# Altium PCB usb05.pcbdoc
Units mm, origin at the board's own origin, x right, y up, seen from the top; angles counter-clockwise.
Board outline 43.06 x 53.77 mm, 2 copper layers (Top Layer, Bottom Layer); 1 components, 6 nets, 9 pads, 0 vias.
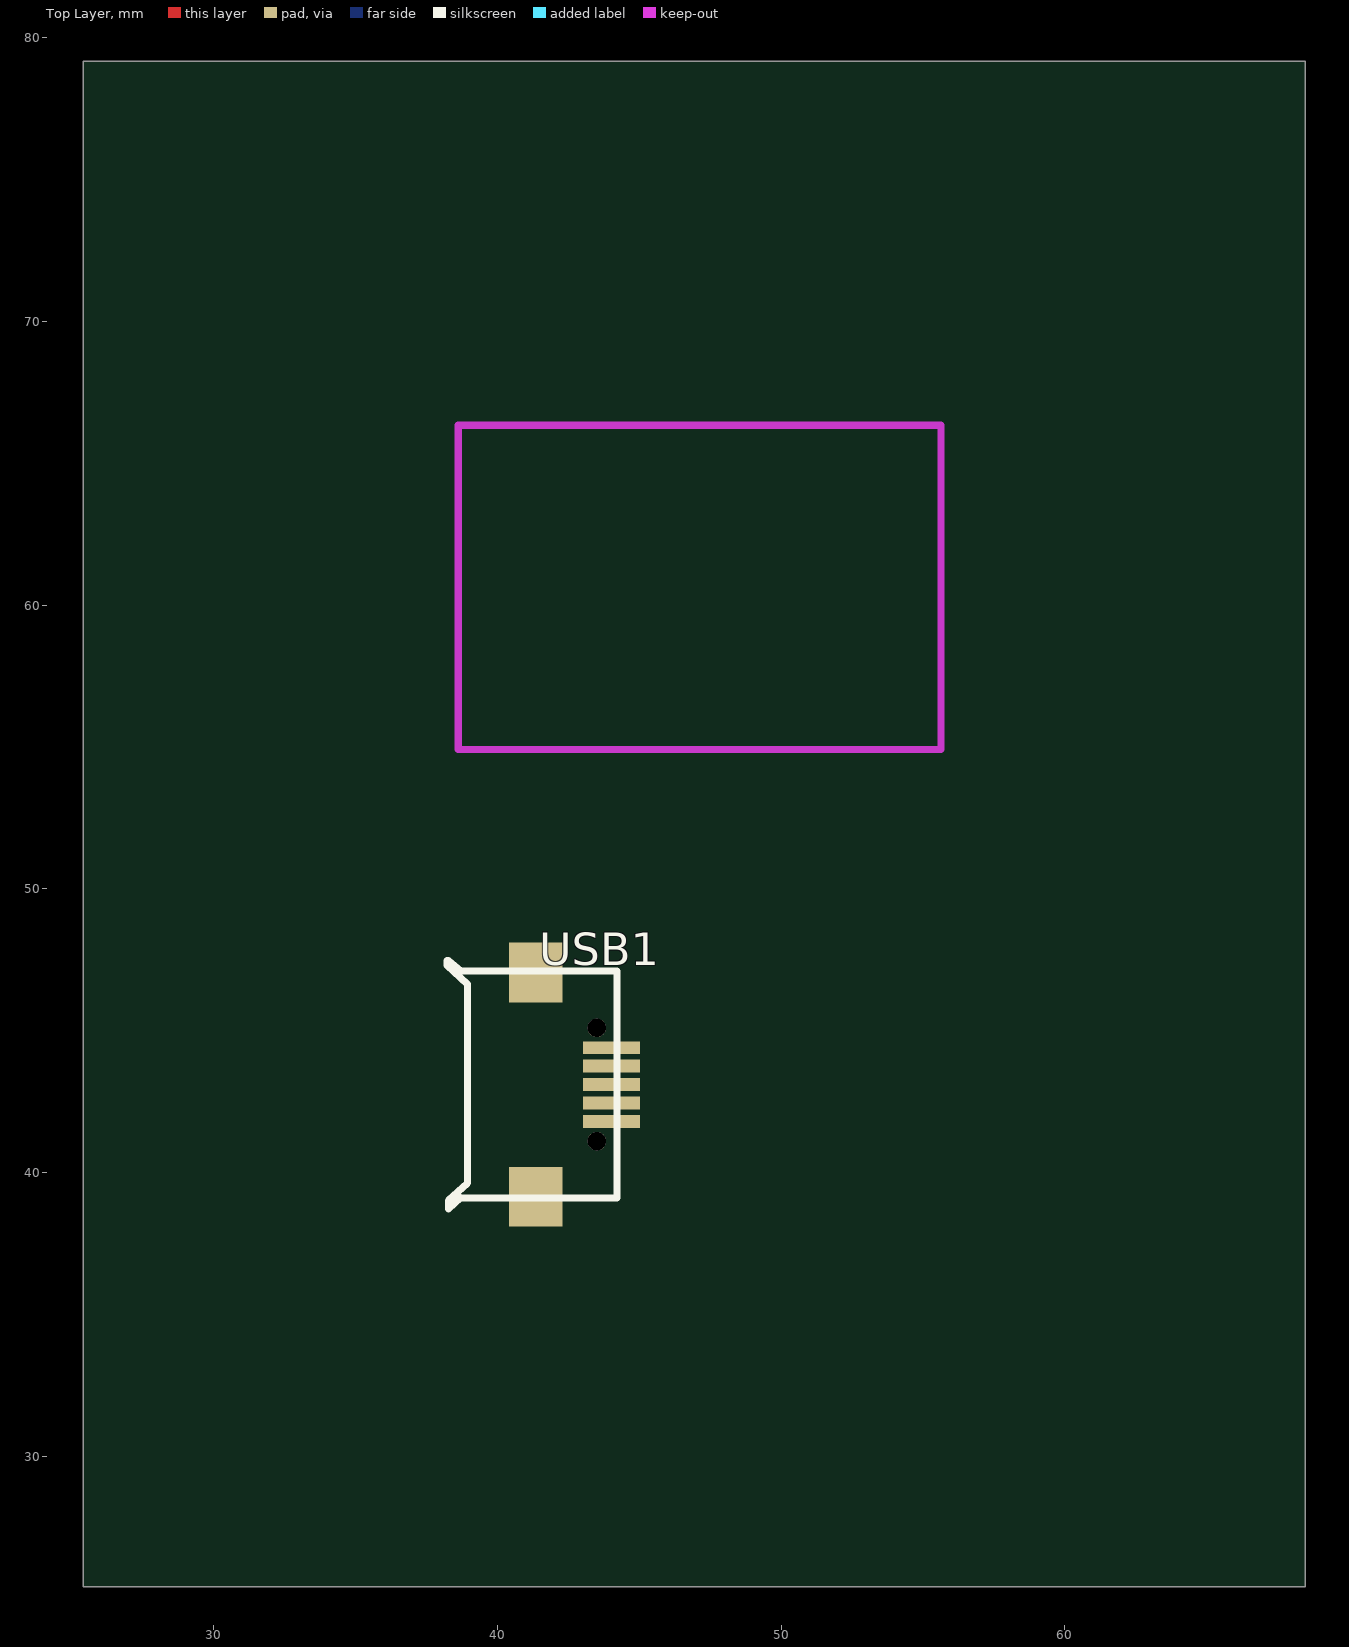
[diagram p0: Top Layer view]
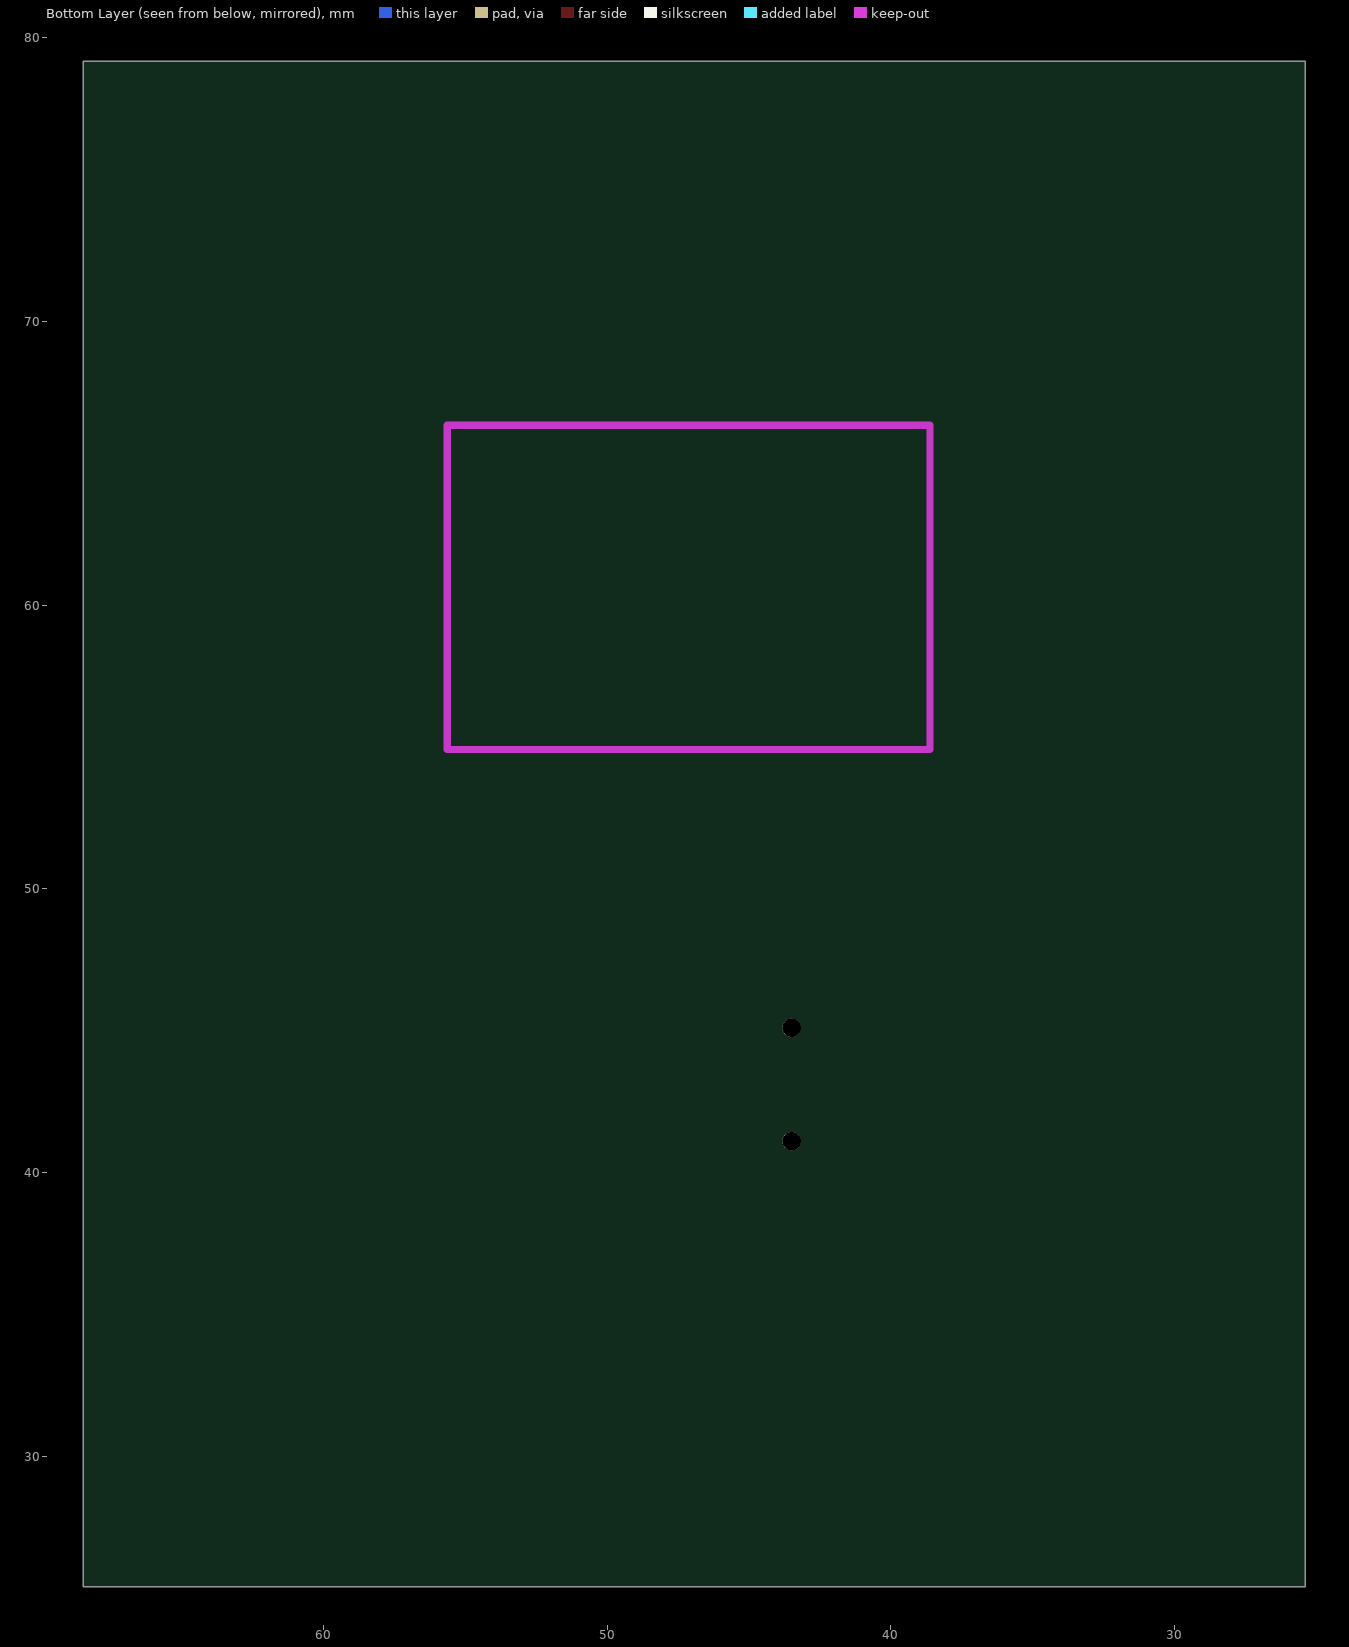
[diagram p1: Bottom Layer view, seen from below]

## Layer stack, top to bottom
Top Layer: signal copper (thickness not stored)
Dielectric: dielectric 0.32, FR-4, Dk 4.8
Bottom Layer: signal copper (thickness not stored)

## Board outline
68.464,25.4 25.4,25.4 25.4,79.168 68.464,79.168

## Components (designator, comment, footprint, x,y, rotation, side; value= is the part's Value field where it differs from the comment)
USB1 "MICRO 5PFemale BType all posts Short needle" MICRO-USB-12 42.683,43.1 r0 top

## Footprints (in the part's own frame and the unit in brackets; to place one, negate y for a bottom-side part, rotate by r counter-clockwise, add the part's x,y. Pads: shape width x height; smd on the part's side, far side on the other; paste and mask are expansions set on the pad)
MICRO-USB-12 [mm]
  rect 1.9x2.1 smd: 0(-1.335,-3.95) 0(-1.335,3.95)
  rect 2x0.45 smd: 1(1.335,1.3) 2(1.335,0.65) 3(1.335,0) 4(1.335,-0.65) 5(1.335,-1.3)
  round 0.65 hole 0.65 unplated: ""(0.814,-1.999) ""(0.814,1.999)
  silkscreen extent -4.46,-4.38 1.53,4.37

## Nets (pads, with @x,y where several pads share a name; then routed paths per layer and width w, separated by ;. In a path a pad name is that pad's centre, name@x,y a point inside that pad or via, vN(x,y) a via of type N, cw(c..) or ccw(c..) an arc to the next point about the centre after c; other vN are vias at no path point)
USB1_0: USB1.0
USB1_1: USB1.1
USB1_2: USB1.2
USB1_3: USB1.3
USB1_4: USB1.4
USB1_5: USB1.5
pads on no net: USB1.

## Silkscreen, mask and mechanical layers (free items; w line width, h text height)
Document:
  lines w0.003: 46.907,52.258 46.958,52.309